# EAGLE board working (EAGLE 7.1.0)
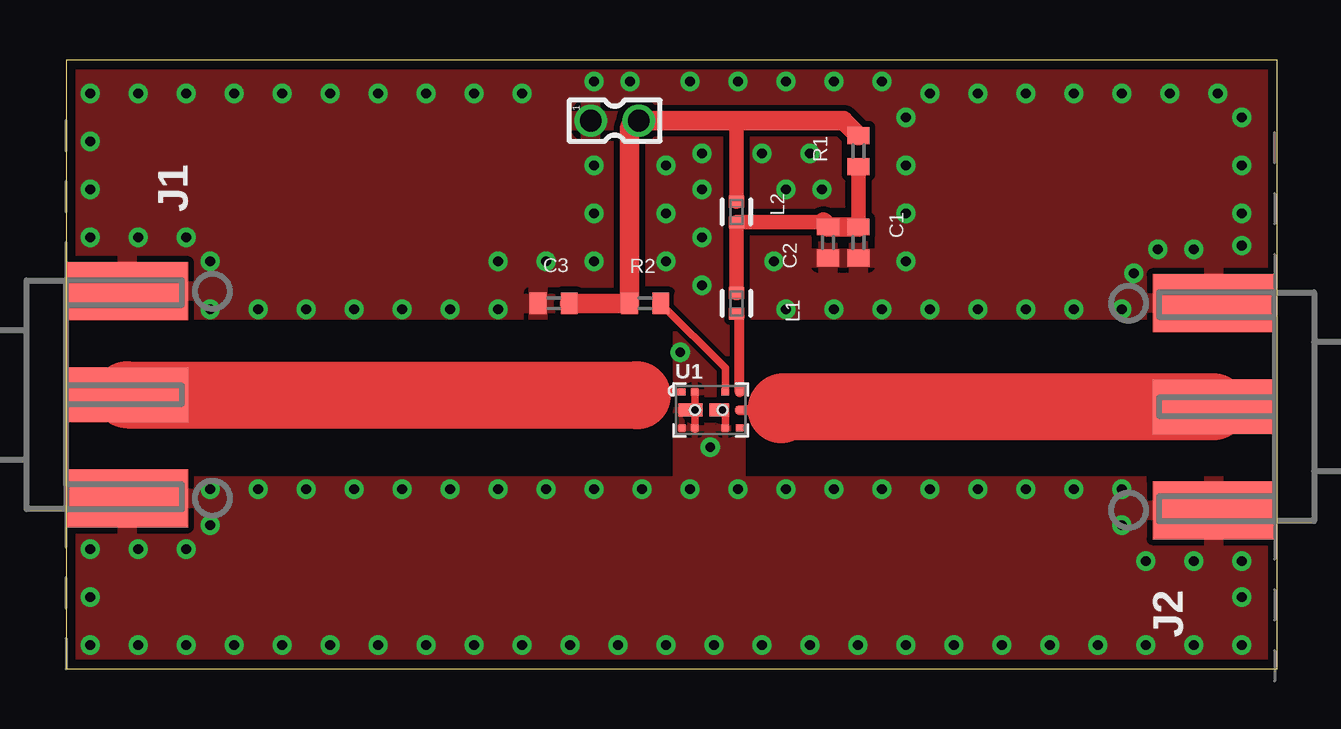
[diagram p0: board, top side]
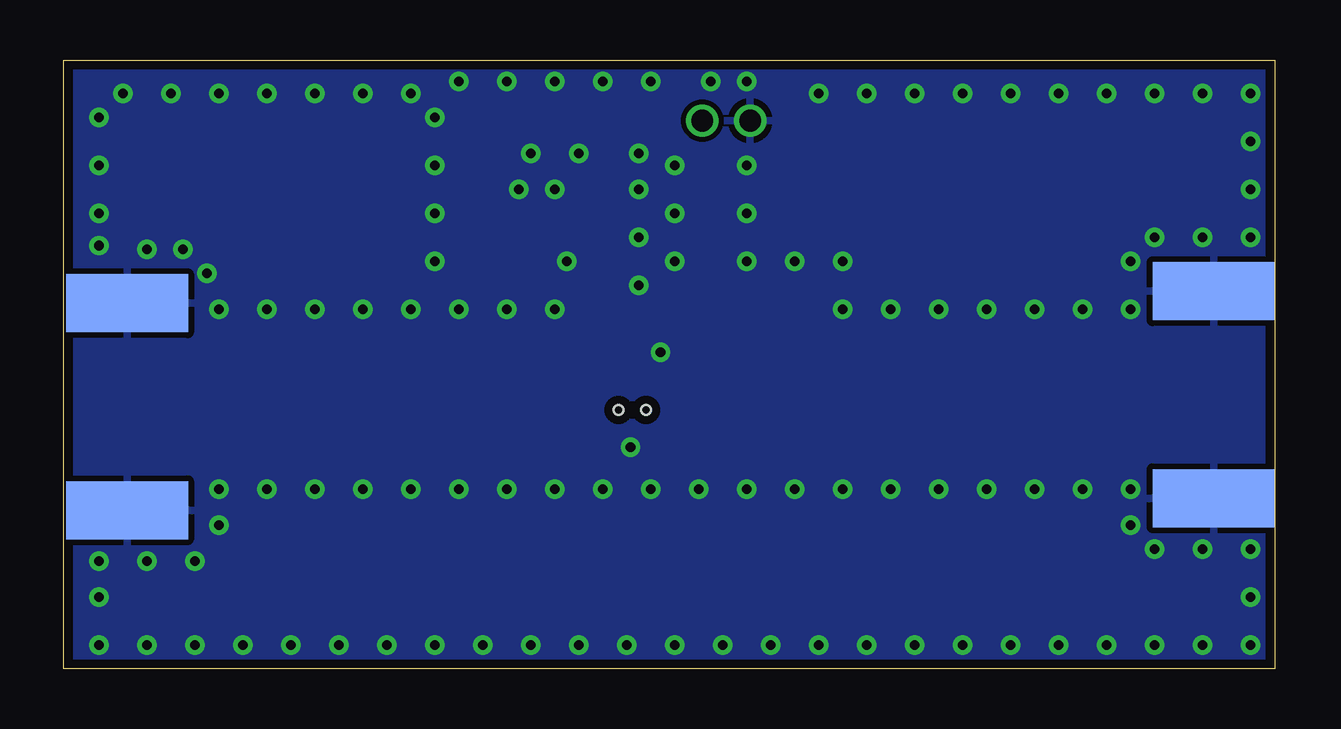
[diagram p1: board, bottom side, seen from below]

Size 50.47 x 25.39 mm. Coordinates in mm from the lower left corner, seen from the top.
Outline: 0,0 50.47,0 50.47,25.39 0,25.39 0,0
Copper layers (1*16): Top 0.0178mm / dielectric 59mil / Bottom 0.0178mm
Design rules "epl-lpkf": minimum track width 8mil, minimum drill 0.35mm, track to track 8mil, track to pad 8mil, pad to pad 8mil, via to via 8mil, smd to smd 8mil, copper to edge 15mil, drill to drill 15mil, minimum pad ring 8mil, minimum via ring 8mil, stop-mask expansion 3mil, vias tented up to drill 0mil, thermal gap 10mil
Holes 0.4 mm at 26.2,10.8 27.35,10.8

## Footprints (pad centres in the part's own frame; a part is rotated, then mirrored left to right if it is on the bottom)
C0402 = smd 0.7 x 0.9: 1 -0.65,0; 2 0.65,0
SMA-CON-EMERSON = smd 2.413 x 5.08: GND -4.318,0; GND@1 4.318,0 | smd 2.413 x 5.08 bottom: GND@2 -4.318,0; GND@3 4.318,0 | smd 2.286 x 5.08: SIG 0,0
0402-C = smd 0.49 x 0.62: 1 -0.43,0; 2 0.43,0
R0402 = smd 0.7 x 0.9: 1 -0.65,0; 2 0.65,0
AVAGO+SAW+LNA = smd 0.3 x 0.3: 1 -1,0.75; 2 -1,-0.75; 3 -0.47,-0.75; 4 0.8,-0.75; 5 1.4,-0.75; 6 1.4,0; 7 1.4,0.75; 8 0.8,0.75; 9 -0.47,0.75 | smd 1 x 0.55: P$1 -0.65,0 | smd 0.8 x 0.55: P$2 0.55,0
332-02 = drill 0.9 pad 1.27: 1 0,-1; 2 0,1

## Placement (x,y rotation side)
C1  47 pF  [C0402]  33.02,17.78 270 top
C2  .1 uF  [C0402]  31.75,17.78 270 top
C3  330 pF  [C0402]  20.32,15.24 180 top
J1  CON_SMA-ENDFIRE_EMERSON_EMERSON-142-0701-801  [SMA-CON-EMERSON]  2.54,11.43 90 top
J2  CON_SMA-ENDFIRE_EMERSON_EMERSON-142-0701-801  [SMA-CON-EMERSON]  47.83,10.93 270 top
L1  18nH  [0402-C]  27.94,15.24 270 top
L2  22nH  [0402-C]  27.94,19.05 270 top
R1  10  [R0402]  33.02,21.59 270 top
R2  4.7k  [R0402]  24.13,15.24 0 top
U1  AVAGO-ALM-GPXX  [AVAGO+SAW+LNA]  26.67,10.79 0 top
X1  332-02  [332-02]  22.86,22.86 270 top

## Library data of the parts
C1-C3 R1 R2 = rcl
J1 J2 = emerson-sma-endfire
L1 L2 = rcl_custom
U1 = ic-lna-ALM-GPxx-Avago
X1 = con-garry

## Nets
GND: C1.2 C2.2 C3.2 J1.GND J1.GND@1 J1.GND@2 J1.GND@3 J2.GND J2.GND@1 J2.GND@2 J2.GND@3 U1.2 U1.3 U1.4 U1.9 U1.P$1 U1.P$2 X1.1
N$1: J1.SIG U1.1
N$3: L1.2 U1.7
N$5: C3.1 L2.1 R1.1 R2.1 X1.2
N$6: C1.1 C2.1 L1.1 L2.2 R1.2
N$7: R2.2 U1.8
N$9: J2.SIG U1.6

## Tracks (layer width: path | path; a pad name or v marks a point on that pad's centre or on a via)
GND  (via drill 0.4)
  Top 0.305: U1.P$2 27.47,10.54 U1.4 | 26.2,10 26.2,10.62 U1.P$1 26.2,10.79 U1.9
  other vias: 1,20 1,18 10,15 8,15 25.6,13.2 32,15 42,15 49,17.65 49,19 47,4.5 26.85,9.25 45,4.5 49,3 49,1 1,5 1,3 1,22 1,24 3,24 5,24 7,24 9,24 11,24 13,24 15,24 17,24 19,24 22,24.5 23.5,24.5 26,24.5 9,1 3,18 5,18 6,17 6,15 12,15 14,15 16,15 18,15 18,17 20,17 22,17 22,19 22,21 28,24.5 30,24.5 32,24.5 34,24.5 35,23 36,24 38,24 40,24 42,24 44,24 46,24 48,24 49,23 49,21 47,17.5 45.5,17.5 44.5,16.5 44,15 40,15 38,15 36,15 34,15 30,15 35,17 35,19 35,21 6,7.5 8,7.5 10,7.5 12,7.5 14,7.5 16,7.5 18,7.5 20,7.5 22,7.5 24,7.5 26,7.5 28,7.5 30,7.5 32,7.5 34,7.5 36,7.5 38,7.5 40,7.5 42,7.5 44,7.5 44,6 49,4.5 47,1 45,1 43,1 41,1 6,6 5,5 3,5 1,1 3,1 5,1 7,1 11,1 13,1 15,1 17,1 19,1 21,1 23,1 25,1 27,1 29,1 31,1 33,1 35,1 37,1 39,1 29.5,17 25,21 25,19 25,17 26.5,21.5 26.5,20 26.5,18 26.5,16 29,21.5 31,21.5 30,20 31.5,20
  pour Top (isolate 0.25): 0,25.4 50.8,25.4 51,14.97 0.2,14.97
  pour Top (isolate 0.01): 25.4,15.24 25.4,5.08 28.2,5.08 28.2,15.6 25.4,15.6
  pour Top (isolate 0.25): 0,0 0,7.62 50.8,7.62 50.8,0
  pour Bottom: 0,26 0,0 2,0 51,0 51,26
N$1
  Top 0.305: 23.8,11.4 23.95,11.54 U1.1
  Top 2.8: J1.SIG 23.77,11.43 arc-90 23.8,11.4
N$3
  Top 0.406: U1.7 28.07,14.68 L1.2
N$5
  Top 0.61: L2.1 27.94,22.86
  Top 0.813: C3.1 R2.1 23.48,22.48 arc-90 X1.2 27.94,22.86 32.4,22.86 R1.1
N$6
  Top 0.61: L1.1 L2.2 31.56,18.62 | C1.1 R1.2
  Top 0.813: 31.56,18.62 C2.1 C1.1
N$7
  Top 0.305: U1.8 27.47,12.55 R2.2
N$9
  Top 0.406: U1.6 28.8,10.79 28.8,10.8
  Top 0.61: 28.8,10.8 29.8,10.8
  Top 2.8: J2.SIG 29.93,10.93 arc90 29.8,10.8